# Altium PCB Power_board_teensy V2.0.PcbDoc
Units mm, origin at the board's own origin, x right, y up, seen from the top; angles counter-clockwise.
Board outline 76.2 x 50.8 mm, 2 copper layers (Top, Bottom), stack 1.572 mm thick; 21 components, 7 nets, 53 pads, 0 vias.
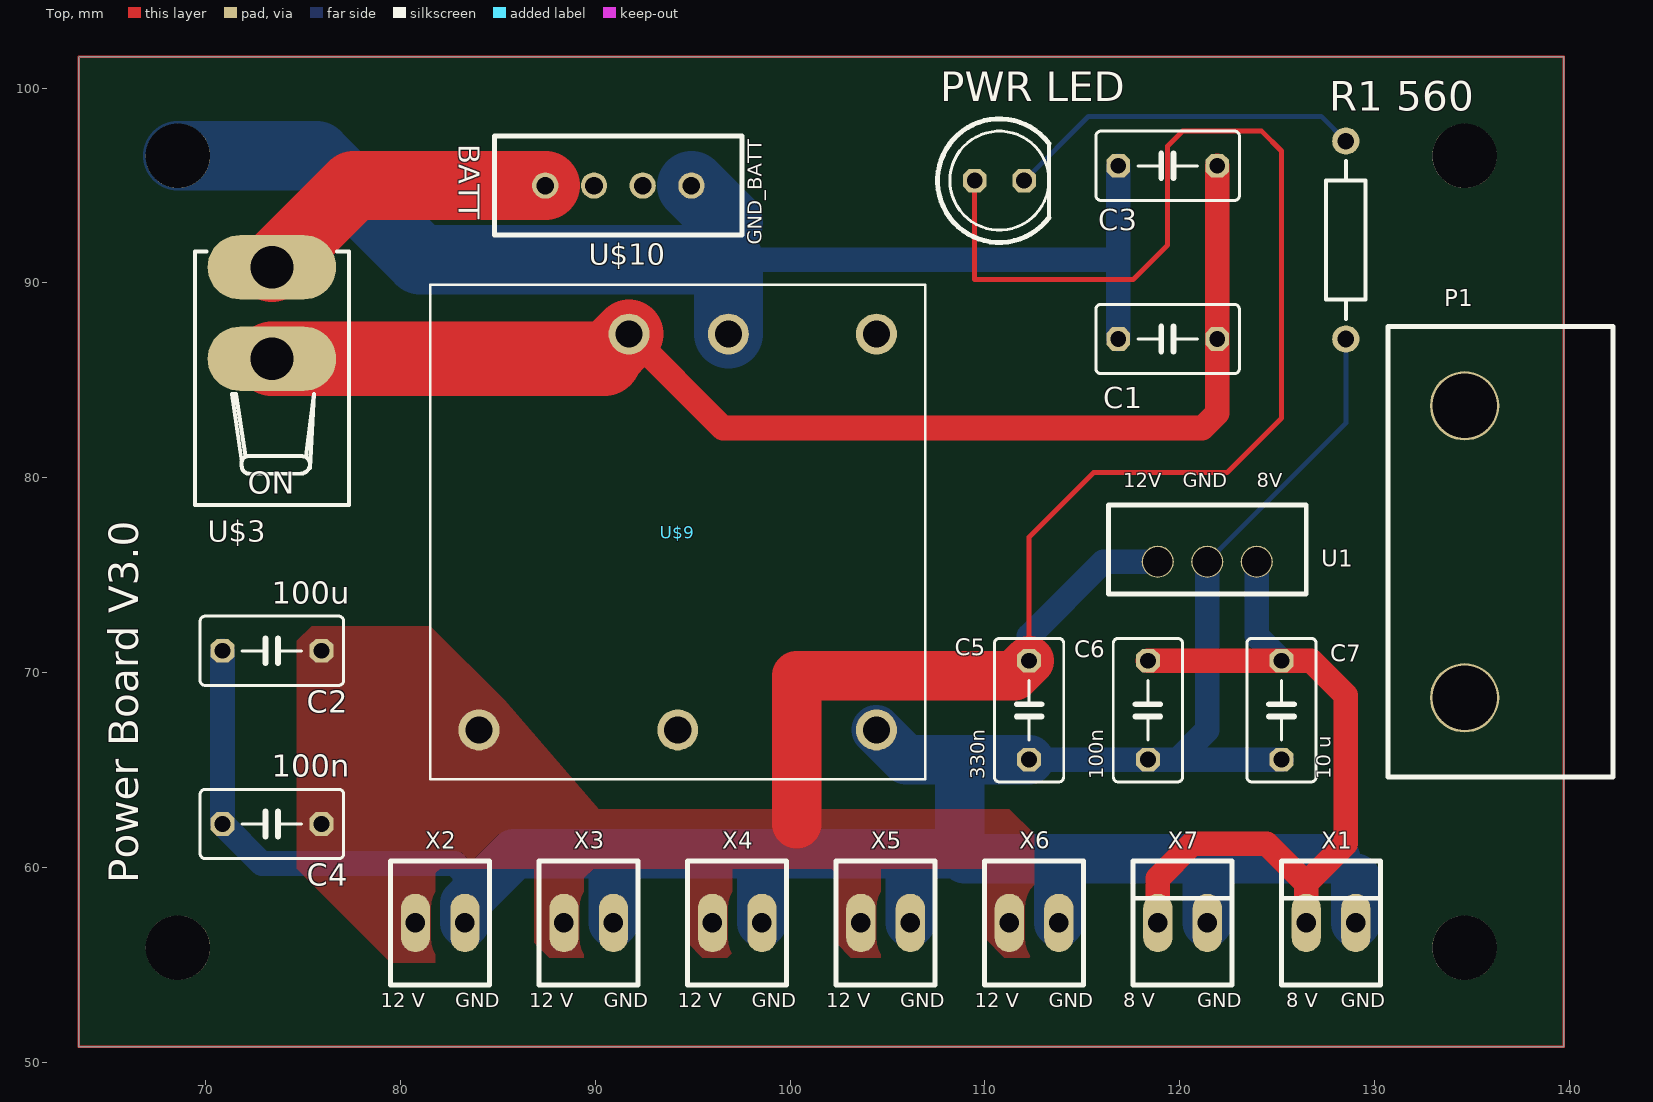
[diagram p0: Top view]
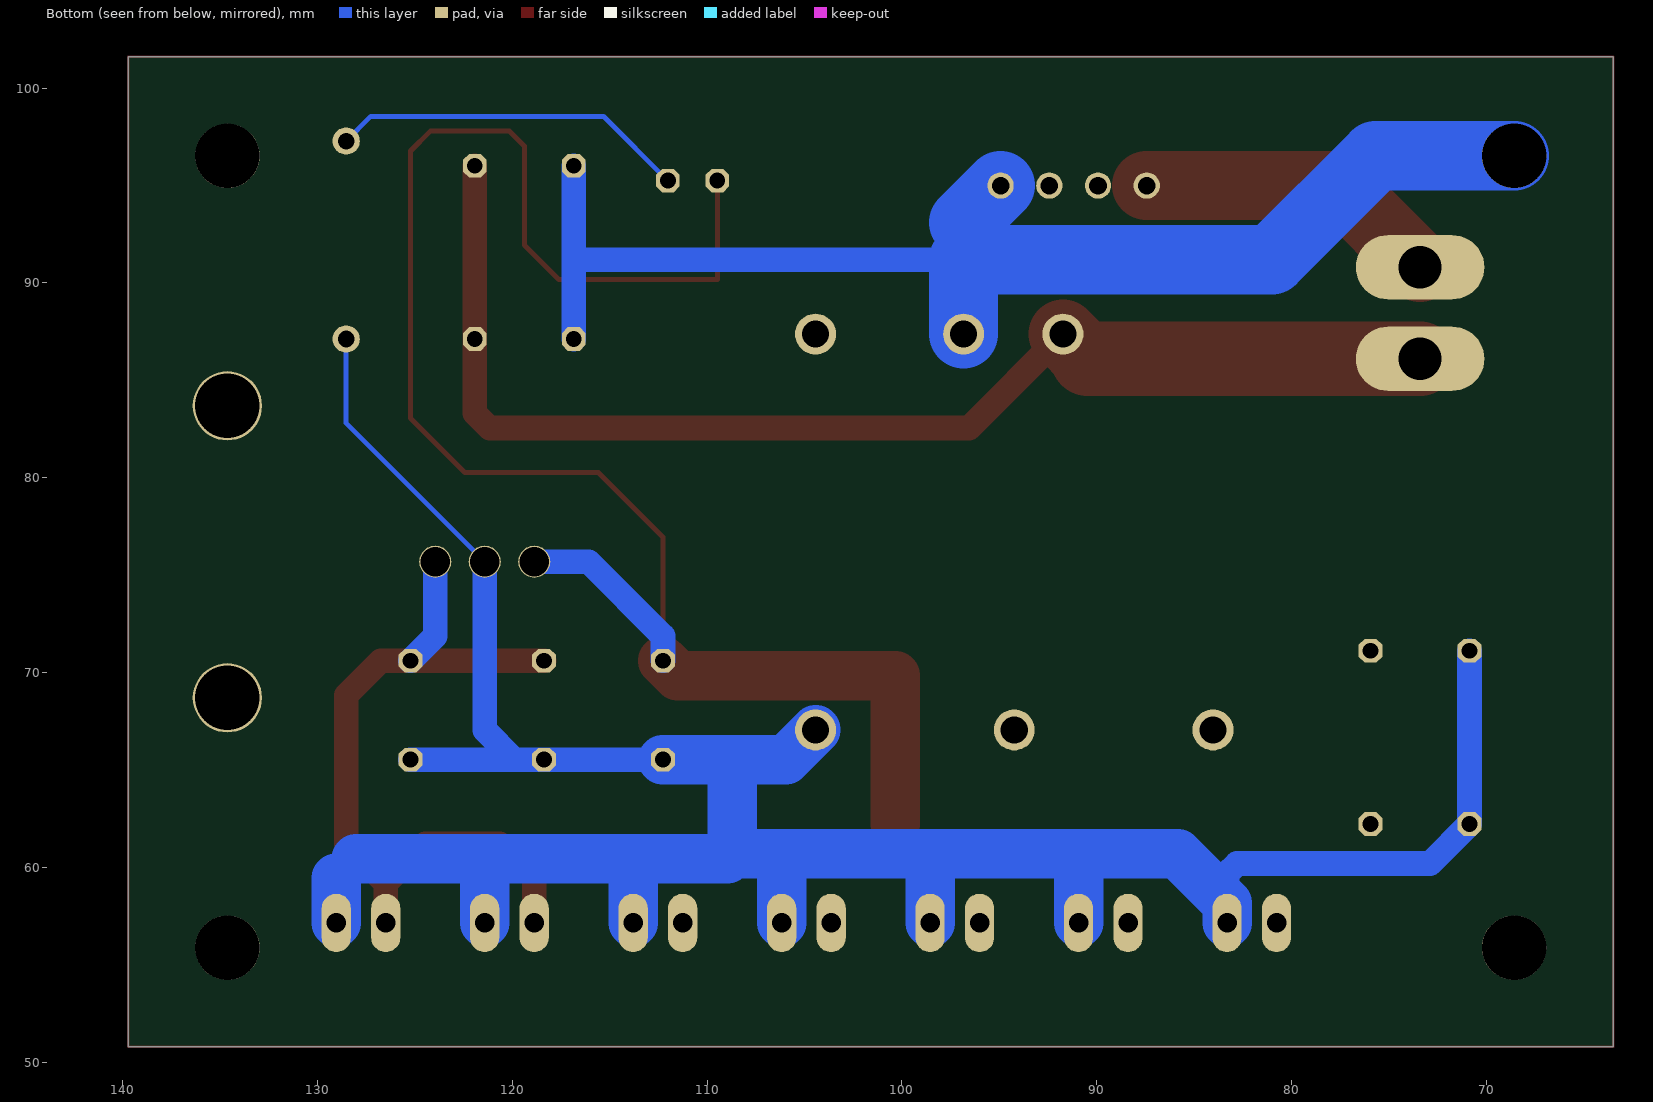
[diagram p1: Bottom view, seen from below]

## Layer stack, top to bottom
Top Solder: solder mask 0.0102, Solder Resist, Dk 3.5
Top: signal copper 0.0356
Dielectric 1: core 1.5011, FR-4, Dk 4.8
Bottom: signal copper 0.0356
Bottom Solder: solder mask 0.0102, Solder Resist, Dk 3.5

## Board outline
63.5,101.6 63.5,50.8 139.7,50.8 139.7,101.6

## Design rules (kind name [scope] priority, off if disabled: settings)
Clearance [All] p1: gap=0.152 ignorepadtopadclearanceinfootprint=TRUE except(0: Arc-Hole Track-Hole SMDPad-SMDPad SMDPad-THPad SMDPad-Via SMDPad-Hole THPad-Hole Via-Hole Fill-Hole Poly-Hole Region-Hole Text-Hole; 1: Arc-Poly Track-Poly SMDPad-Poly THPad-Poly Via-Poly Fill-Poly Poly-Poly)
Clearance "Clearance (Same Net)" [All] p2: gap=0 ignorepadtopadclearanceinfootprint=FALSE except(0.152: SMDPad-SMDPad SMDPad-THPad SMDPad-Via)
HoleSize HoleSize_1 [All] p1: absolutevalues=TRUE maxlimit=2540 minlimit=0.33 maxpercent=80.000 minpercent=20.000
HoleSize [All] p2: absolutevalues=TRUE maxlimit=2.54 minlimit=0.025 maxpercent=80.000 minpercent=20.000
HoleToHoleClearance mdViaViaSameLayer [All] p1: gap=0.203 allowstackedmicrovias=TRUE
HoleToHoleClearance [All] p2: gap=0.254 allowstackedmicrovias=TRUE
PasteMaskExpansion mlMinCreamFrame [All] p1: expansion=0
PasteMaskExpansion [All] p2: expansion=0
PolygonConnect ThermalVias [IsVia] p1: connectstyle=Direct reliefconductorwidth=0.254 reliefentries=4 polygonreliefangle="90 Angle" airgapwidth=0.254
PolygonConnect [All] p2: connectstyle=Direct reliefconductorwidth=0.254 reliefentries=4 polygonreliefangle="90 Angle" airgapwidth=0.254
RoutingVias [All] p1: holewidth=0.711 width=1.27 viastyle="Through Hole" minholewidth=0.711 minwidth=1.27 maxholewidth=0.711 maxwidth=1.27
SilkToSilkClearance [All] p1 off: silktosilkclearance=0.254
SilkToSolderMaskClearance [IsPad] p1 off: minsilkscreentomaskgap=0.254 clearancetoexposedcopper=TRUE
SolderMaskExpansion mlMinStopFrame [All] p1: expansion=0.076
SolderMaskExpansion [All] p2: expansion=0.102
Width Width_1 [All] p1: maxlimit=2540 minlimit=0.152 preferedwidth=0.254
Width [All] p2: maxlimit=2.54 minlimit=0.254 preferedwidth=2.54
25 further rules are at their usual default settings.

## Components (designator, comment, footprint, x,y, rotation, side; value= is the part's Value field where it differs from the comment)
C1 "100u" C050-035X075 119.38,87.122 r180 top
C2 "100u" C050-035X075 73.406,71.12 r180 top
C3 "100n" C050-035X075 119.38,96.012 r180 top
C4 "100n" C050-035X075 73.406,62.23 r180 top
C5 "0.33uF" C050-035X075 112.268,68.072 r270 top
C6 "100nF" C050-035X075 118.364,68.072 r270 top
C7 "10uF" C050-035X075 125.222,68.072 r270 top
P1 "antenna pads" "Antenna pads" 134.62,76.2 r270 top
"PWR LED" "PWR" LED5MM 110.744,95.25 r0 top (schematic designator LED1)
"R1 560" "" AXIAL-0.4 128.524,92.202 r90 top value=560 (schematic designator R1)
U1 "12V to 8V LDO" BA7808CP-E2 121.412,75.692 r0 top
U$3 "360-3240-ND" 360-3240-ND 69.456,78.606 r0 top
U$9 "12V_TRANSFORMER" 12V_TRANSFORMER 104.434,77.216 r0 top
U$10 "BATT" BATTERY_CONNECTOR 91.186,94.996 r180 top
X1 "22-23-2021" 22-23-2021 127.762,57.15 r0 top
X2 "22-23-2021" 22-23-2021 82.042,57.15 r0 top
X3 "22-23-2021" 22-23-2021 89.662,57.15 r0 top
X4 "22-23-2021" 22-23-2021 97.282,57.15 r0 top
X5 "22-23-2021" 22-23-2021 104.902,57.15 r0 top
X6 "22-23-2021" 22-23-2021 112.522,57.15 r0 top
X7 "22-23-2021" 22-23-2021 120.142,57.15 r0 top

## Footprints (in the part's own frame and the unit in brackets; to place one, negate y for a bottom-side part, rotate by r counter-clockwise, add the part's x,y. Pads: shape width x height; smd on the part's side, far side on the other; paste and mask are expansions set on the pad)
12V_TRANSFORMER [mm] "12V_TRANSFORMER"
  round 2.1 hole 1.4: P$1(-12.7,10.16) P$2(-7.6,10.16) P$3(-20.4,-10.16) P$4(-10.2,-10.16) P$5(0,-10.16) P$6(0,10.16)
  silkscreen extent -22.9,-12.7 2.5,12.7
22-23-2021 [mm]
  oval 1.5x3 hole 1: 1(-1.27,0) 2(1.27,0)
  silkscreen extent -2.54,-3.17 2.54,3.17
360-3240-ND [mm] "360-3240-ND"
  oval 6.6x3.3 hole 2.2: 2(3.95,7.5) 3(3.95,12.2)
  silkscreen extent 0,0 7.9,13
"Antenna pads" [mil] "sma connector standoff"
  round 140 hole 130: 1(-295,0) 2(295,0)
  silkscreen extent -455,-155 455,300
AXIAL-0.4 [mm] "Axial Device, Thru-Hole; 2 Leads; 0.4 in Pin Spacing"
  round 1.4 hole 0.85: 1(-5.08,0) 2(5.08,0)
  silkscreen extent -4.06,-1.02 4.06,1.02
BA7808CP-E2 [mil]
  round 65 hole 60: 1(-100,0) 2(0,0) 3(100,0)
  silkscreen extent -200,-65 200,115
BATTERY_CONNECTOR [mm] "BATTERY_CONNECTOR"
  round 1.35 hole 0.9: P$1(-3.75,0) P$2(-1.25,0) P$3(1.25,0) P$4(3.75,0)
  silkscreen extent -6.35,-2.54 6.35,2.54
C050-035X075 [mil] "C050-035X075"
  oct 48x48 hole 32: 1(-100,0) 2(100,0)
  silkscreen extent -145,-70 145,70
LED5MM [mil]
  oct 48x48 hole 32: A(-50,0) K(50,0)
  silkscreen extent -125,-125 100,125, body extent -116,-116 116,116, height 346

## Part data
C1 C2 C3 C4 C5 C6 C7: library part C-US050-035X075, "CAPACITOR, American symbol"
"PWR LED": library part LED5MM
"R1 560": library part Res2, "Resistor", LatestRevisionDate=17-Jul-2002, LatestRevisionNote="Re-released for DXP Platform.", PackageDescription="Axial Device, Thru-Hole; 2 Leads; 0.4 in Pin Spacing", PackageReference=AXIAL-0.4, Published=8-Jun-2000, Publisher="Altium Limited"
U1: library part BA78M08FP-E2
U$3: "SPST two lead switch Pin 2 is common Swtich Closed on Down Position DigiKey: http://www.digikey.com/product-detail/en/nkk-switches/M2011S2A1W01/360-3240-ND/1049342 Data Sheet: http://2t70un3m1d9z1kztamkdrd38.wpengine.netdna-cdn.com/wp-content/uploads/2016/02/MtogglesBushing.pdf"
U$9: "CUI Inc │ SERIES: PDQ30-D │ DESCRIPTION: DC-DC CONVERTER http://www.mouser.com/pdfdocs/pdq30-d.pdf"
U$10: library part BATTERY_CONNECTOR
X1 X2 X3 X4 X5 X6 X7: ".100\" (2.54mm) Center Header - 2 Pin", MF=MOLEX, MPN=22-23-2021, OC_FARNELL=1462926, OC_NEWARK=25C3832

## Free pads (board coordinates)
  round 3.3 hole 3.3: 1(68.58,55.88) 1(68.58,96.52) 1(134.62,55.88) 1(134.62,96.52)

## Nets (pads, with @x,y where several pads share a name; then routed paths per layer and width w, separated by ;. In a path a pad name is that pad's centre, name@x,y a point inside that pad or via, vN(x,y) a via of type N, cw(c..) or ccw(c..) an arc to the next point about the centre after c; other vN are vias at no path point)
GND_12: "R1 560.1" C2.2 C4.2 C5.2 C6.2 C7.2 U1.2 U$9.P$5 X1.2 X2.2 X3.2 X4.2 X5.2 X6.2 X7.2 | length 144
  Bottom w0.254: U1.2 128.524,82.804 128.524,87.122
  Bottom w1.27: C2.2 C4.2 72.898,60.198 82.804,60.198 83.312,59.69 X2.2@83.312,58.166 ; C5.2 C6.2 119.888,65.532 ; 120.904,60.452 121.412,59.944 ; U1.2 121.412,67.056 119.888,65.532 ; C7.2 119.888,65.532 ; 128.016,60.452 129.032,59.436
  Bottom w2.54: X2.2 83.312,58.166 85.852,60.706 90.678,60.706 ; X3.2 90.932,60.452 90.678,60.706 ; X4.2 98.552,59.944 97.79,60.706 ; U$9.P$5 105.958,65.532 108.712,65.532 ; X5.2 106.172,60.706 ; C5.2 108.712,65.532 ; X6.2 113.792,59.944 114.3,60.452 ; X7.2 121.412,59.944 ; 128.016,60.452 120.904,60.452 114.3,60.452 ; X1.2 129.032,59.436 ; 90.678,60.706 97.79,60.706 ; 97.79,60.706 106.172,60.706 ; 106.172,60.706 108.712,60.706 ; 108.712,60.706 108.966,60.452 114.3,60.452 ; 108.712,60.706 108.712,65.532
GND_BATT: C1.2 C3.2 pad.1@68.58,96.52 U$9.P$2 U$10.P$1 | length 67.8
  Bottom w1.27: 96.834,91.186 116.84,91.186 ; C1.2 116.84,91.186 ; C3.2 116.84,91.186
  Bottom w2.54: 96.834,91.186 96.834,93.098
  Bottom w3.556: pad.1@68.58,96.52 75.692,96.52 81.026,91.186 96.834,91.186 U$9.P$2 ; U$10.P$1 96.834,93.098
MAIN_BATT: C1.1 C3.1 U$3.2 U$9.P$1 | length 64.1
  Top w1.27: U$9.P$1 96.56,82.55 121.158,82.55 121.92,83.312 C1.1 C3.1
  Top w3.556: 90.464,86.106 U$9.P$1
  Top w3.81: U$3.2 90.464,86.106
NetLED1_K: "PWR LED.K" "R1 560.2" | length 18.4
  Bottom w0.254: 112.014,95.25 115.316,98.552 127.254,98.552 128.524,97.282
V8: C6.1 C7.1 U1.3 X1.1 X7.1 | length 40.5
  Top w1.27: C6.1 C7.1 126.746,70.612 128.524,68.834 128.524,61.214 126.492,59.182 ; X7.1 118.872,59.436 120.65,61.214 124.46,61.214 126.492,59.182 ; X1.1 126.492,59.182
  Bottom w1.27: U1.3 123.952,71.882 C7.1
V11.2: U$3.3 U$10.P$4 | length 15.8
  Top w3.556: U$3.3 77.596,94.996 U$10.P$4
V12: "PWR LED.A" C2.1 C4.1 C5.1 U1.1 U$9.P$3 X2.1 X3.1 X4.1 X5.1 X6.1 | length 92.3
  Top w0.254: 109.474,95.25 109.474,90.17 117.602,90.17 119.38,91.948 119.38,97.028 120.142,97.79 124.206,97.79 125.222,96.774 125.222,83.058 122.428,80.264 115.57,80.264 112.268,76.962 C5.1
  Top w2.54: 100.33,62.23 100.33,69.85 111.506,69.85 C5.1
  Bottom w1.27: C5.1 112.268,71.882 116.078,75.692 U1.1
pads on no net: P1.1 P1.2 U$9.P$4 U$9.P$6 U$10.P$2 U$10.P$3
copper on no net: | length 254
  Top w0.127: 63.5,50.8 63.5,101.6 139.7,101.6 139.7,50.8 63.5,50.8

## Polygon pours and split planes (outlines as drawn)
V12 on Top "Top-No Net" (solid, pour order 10): 85.344,68.58 81.534,72.39 75.438,72.39 74.676,71.628 74.676,59.944 79.502,55.118 81.788,55.118 81.788,59.69 82.042,59.944 86.868,59.944 86.868,56.134 87.63,55.372 89.408,55.372 89.408,59.436 89.916,59.944 94.742,59.944 94.742,56.134 95.504,55.372 96.774,55.372 97.028,55.626 97.028,59.944 102.108,59.944 102.362,59.69 102.362,56.134 103.124,55.372 104.648,55.372 104.648,59.944 109.982,59.944 109.982,56.388 110.998,55.372 112.268,55.372 112.522,55.626 112.522,61.722 111.252,62.992 90.17,62.992

## Silkscreen, mask and mechanical layers (free items; w line width, h text height)
Top Overlay:
  text "GND_BATT" at 98.806,91.948 h1.26 r90
  text "12V" at 117.094,79.248 h1.26
  text "GND" at 120.142,79.248 h1.26
  text "8V" at 123.952,79.248 h1.26
  text "330n" at 110.236,64.516 h1.26 r90
  text "100n" at 116.332,64.516 h1.26 r90
  text "10 u" at 128.016,64.516 h1.26 r90
  text "Power Board V3.0" at 66.548,59.182 h1.52 r90
  text "12 V" at 78.994,52.578 h1.26
  text "GND" at 82.804,52.578 h1.26
  text "12 V" at 86.614,52.578 h1.26
  text "GND" at 90.424,52.578 h1.26
  text "12 V" at 94.234,52.578 h1.26
  text "GND" at 98.044,52.578 h1.26
  text "12 V" at 101.854,52.578 h1.26
  text "GND" at 105.664,52.578 h1.26
  text "12 V" at 109.474,52.578 h1.26
  text "GND" at 113.284,52.578 h1.26
  text "8 V" at 117.094,52.578 h1.26
  text "GND" at 120.904,52.578 h1.26
  text "8 V" at 125.476,52.578 h1.26
  text "GND" at 128.27,52.578 h1.26
Unrouted:
  lines w0: 31.263,50.563 31.263,51.934

## Text inside footprints (layer, text, board x,y; h text height)
U$3: Top Overlay "ON" at 72.156,78.806 h1.97